# Altium PCB Component Switch.PcbDoc
Units mil, origin at the board's own origin, x right, y up, seen from the top; angles counter-clockwise.
Board outline 5320 x 3965 mil, 2 copper layers (Top Layer, Bottom Layer); 31 components, 41 nets, 188 pads, 24 vias.
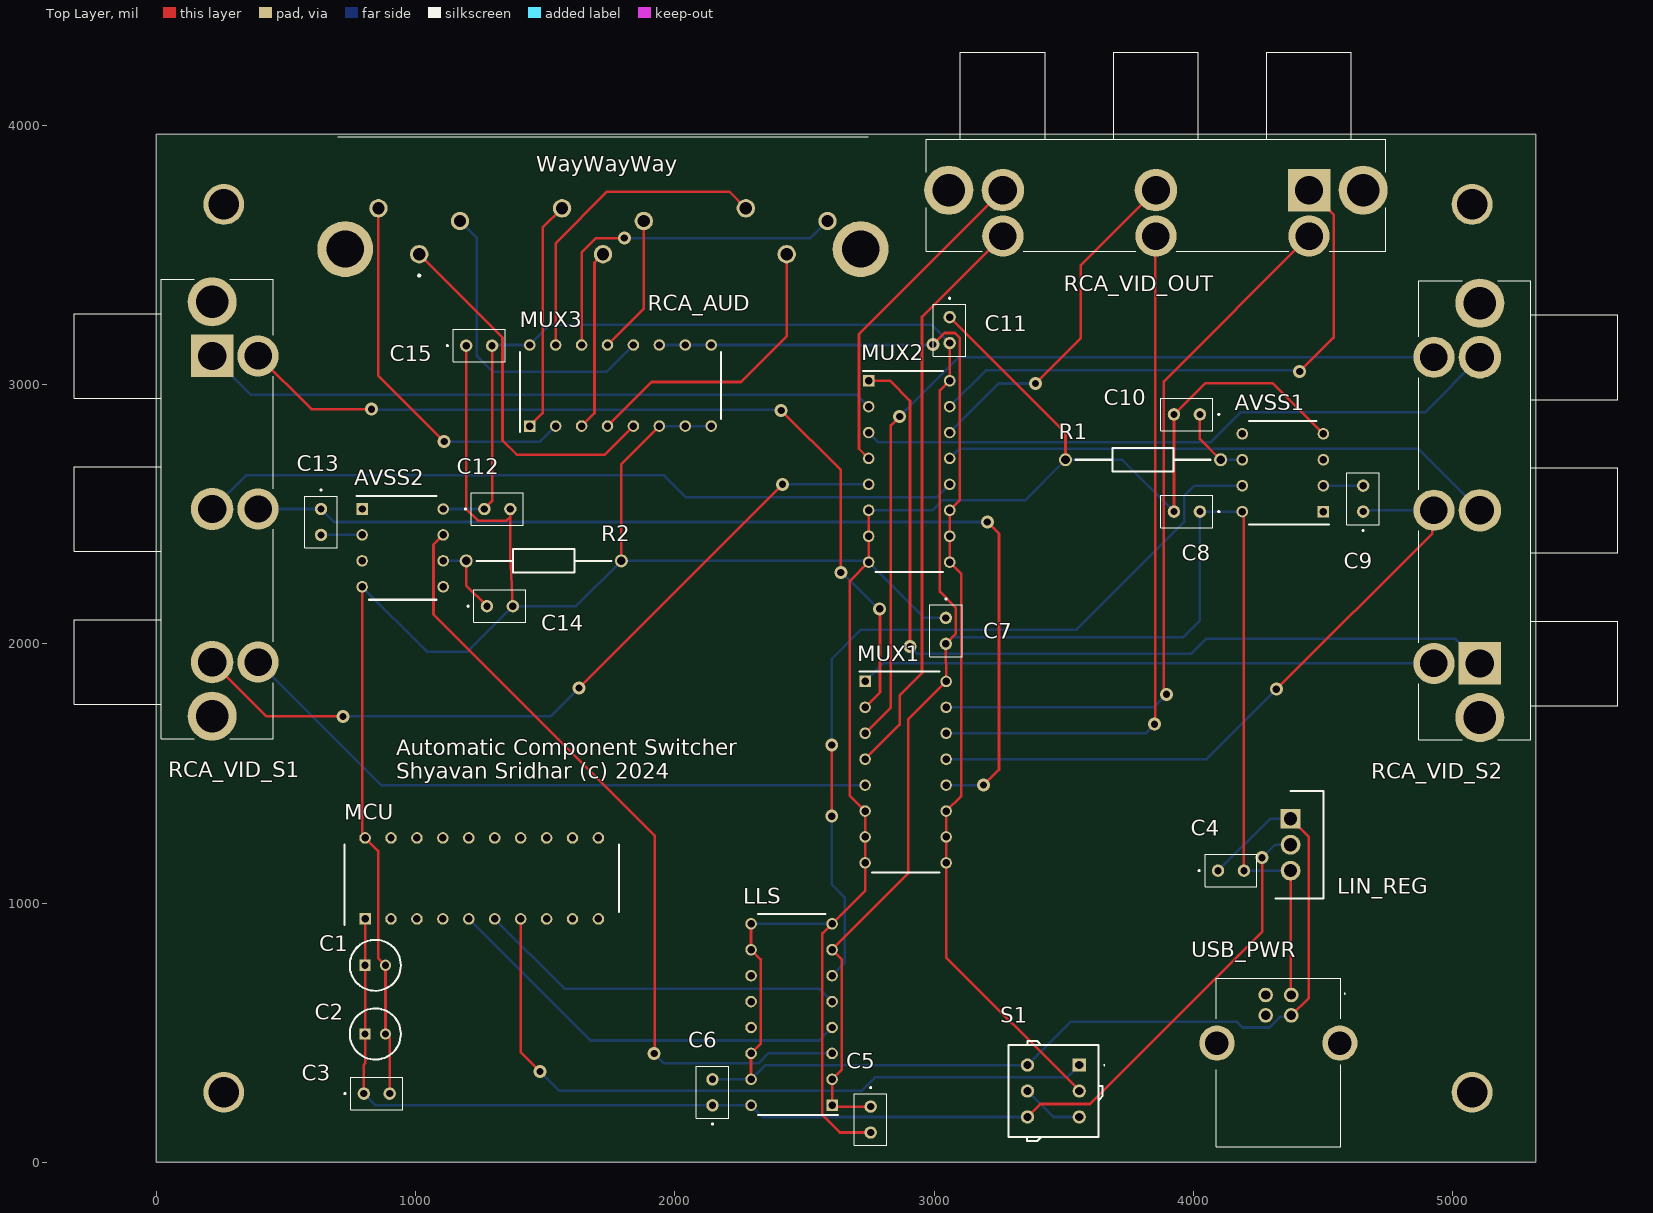
[diagram p0: Top Layer view]
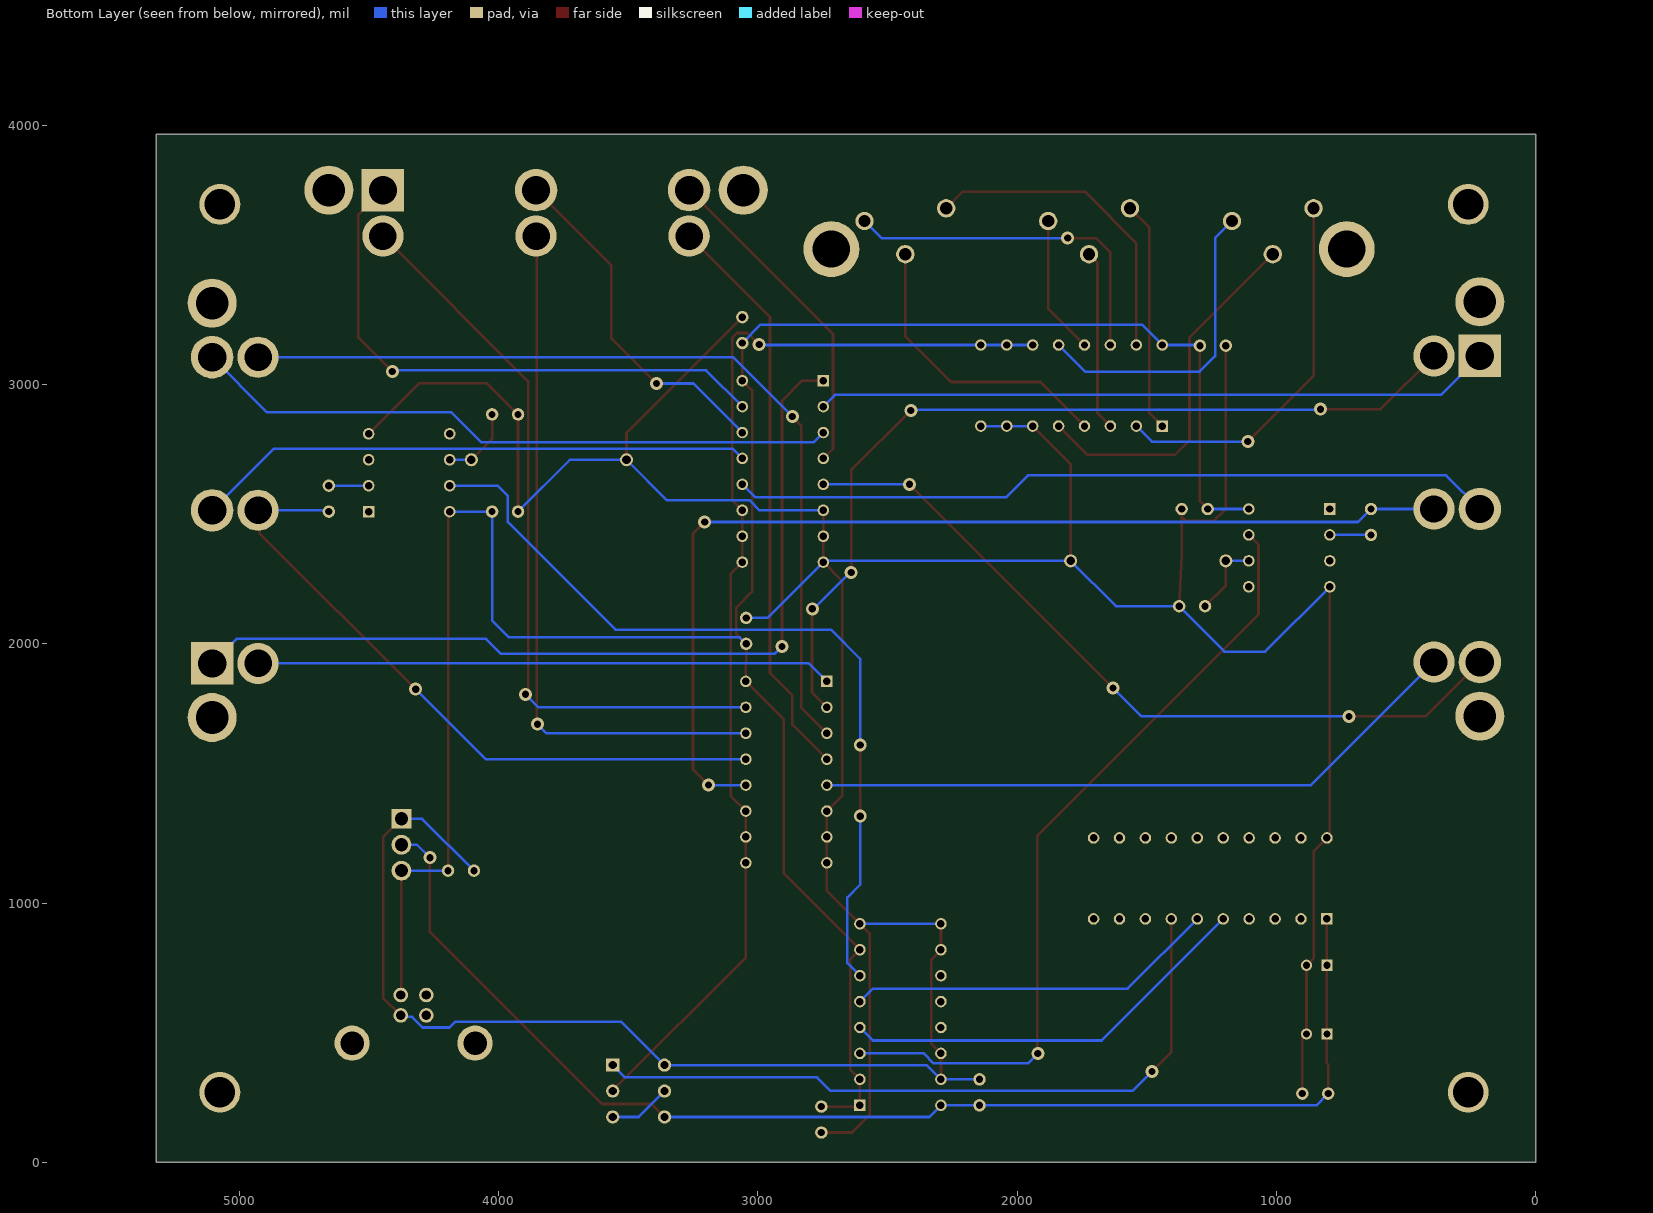
[diagram p1: Bottom Layer view, seen from below]
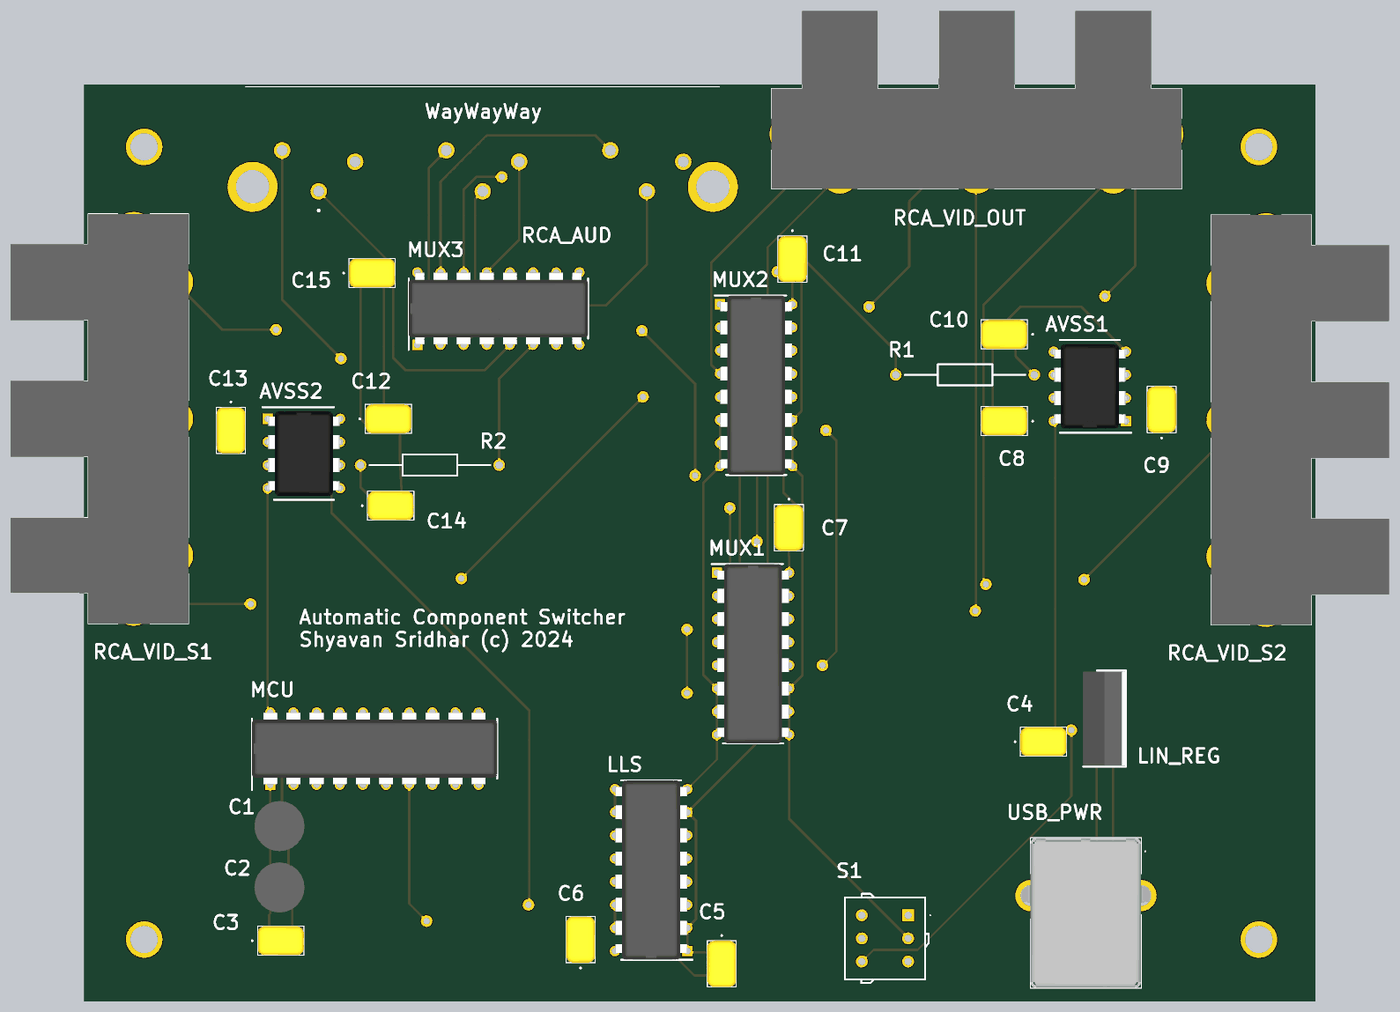
[diagram p2: 3D render of the assembled board from above, using the file's embedded part models]

## Layer stack, top to bottom
Top Solder: solder mask 0.4, Solder Resist, Dk 3.5
Top Layer: signal copper 1.4
Dielectric 1: dielectric 12.6, FR-4, Dk 4.8
Bottom Layer: signal copper 1.4
Bottom Solder: solder mask 0.4, Solder Resist, Dk 3.5

## Board outline
0,0 5320,0 5320,3965 0,3965

## Design rules (kind name [scope] priority, off if disabled: settings)
AssemblyTestpoint [All] p1: testpointundercomponent=TRUE minsize=40 maxsize=100 preferedsize=60 minholesize=0 maxholesize=40 preferedholesize=32 testpointgrid=1 usegrid=TRUE gridoriginx=0 gridoriginy=1295 gridtolerance=0.01 allowsidetop=TRUE allowsidebottom=TRUE
Clearance Clearance_1 [OnMid vs OnMid] p1: gap=10 ignorepadtopadclearanceinfootprint=FALSE sourcerule=37 cellrowname=All cellrowtype=0 cellcolname=All cellcoltype=0 innerlayers=TRUE
Clearance Clearance_2 [(ExistsOnLayer('Top Layer') Or ExistsOnLayer('Bottom Layer')) vs (ExistsOnLayer('Top Layer') Or ExistsOnLayer('Bottom Layer'))] p2: gap=10 ignorepadtopadclearanceinfootprint=FALSE sourcerule=37 cellrowname=All cellrowtype=0 cellcolname=All cellcoltype=0 outerlayers=TRUE
Clearance [All] p3: gap=10 ignorepadtopadclearanceinfootprint=FALSE ismatrix=TRUE
FabricationTestpoint [All] p1: side=3 testpointundercomponent=TRUE minsize=40 maxsize=100 preferedsize=60 minholesize=0 maxholesize=40 preferedholesize=32 testpointgrid=1 allowsidetop=TRUE allowsidebottom=TRUE usegrid=TRUE gridoriginx=0 gridoriginy=1295 gridtolerance=0.01
HoleSize [All] p1: absolutevalues=TRUE maxlimit=200 minlimit=1 maxpercent=80.000 minpercent=20.000
MinimumSolderMaskSliver [All] p1: minsoldermaskwidth=1
PolygonConnect [All] p1: connectstyle=Relief reliefconductorwidth=10 reliefentries=4 polygonreliefangle="90 Angle" airgapwidth=10
RoutingVias [All] p1: holewidth=28 width=50 viastyle="Through Hole" minholewidth=28 minwidth=50 maxholewidth=28 maxwidth=50
SilkToSolderMaskClearance [IsPad] p1: minsilkscreentomaskgap=1 clearancetoexposedcopper=TRUE
SolderMaskExpansion [All] p1: expansion=4 istentingtop=FALSE
SupplyNets "Schematic Supply Nets" [InNet('GND')] p1: voltage=0.000
Width [All] p1: maxlimit=10 minlimit=10 preferedwidth=10
25 further rules are at their usual default settings.

## Components (designator, comment, footprint, x,y, rotation, side; value= is the part's Value field where it differs from the comment)
AVSS1 "LM1881N_NOPB" DIP794W53P254L959H508Q8N 4345,2660 r180 top
AVSS2 "LM1881N_NOPB" DIP794W53P254L959H508Q8N 950,2370 r0 top
C1 "1 μF" CAPPRD200W52D500H1250 805,760 r0 top
C2 "10 μF" CAPPRD200W52D500H1250 805,495 r0 top
C3 "0.1 μF" C320C104K5R5TA 800,265 r0 top
C4 "0.1 μF" C320C104K5R5TA 4095,1125 r0 top
C5 "0.1 μF" C320C104K5R5TA 2755,215 r270 top
C6 "0.1 μF" C320C104K5R5TA 2145,220 r90 top
C7 "0.1 μF" C320C104K5R5TA 3045,2100 r270 top
C8 "0.1 μF" C320C104K5R5TA 4025,2510 r180 top
C9 "0.1 μF" C320C104K5R5TA 4655,2510 r90 top
C10 "0.1 μF" C320C104K5R5TA 4025,2885 r180 top
C11 "0.1 μF" C320C104K5R5TA 3060,3260 r270 top
C12 "0.1 μF" C320C104K5R5TA 1265,2520 r0 top
C13 "0.1 μF" C320C104K5R5TA 635,2520 r270 top
C14 "0.1 μF" C320C104K5R5TA 1275,2145 r0 top
C15 "0.1 μF" C320C104K5R5TA 1195,3150 r0 top
LIN_REG "LM1117T-3.3_NOPB" TO254P470X1028X1955-3P 4375,1325 r270 top
LLS "CD40109BE" DIP794W53P254L1930H508Q16N 2450,570 r180 top
MCU "MSP430G2553IN20" DIP794W53P254L2540H508Q20N 1255,1095 r90 top
MUX1 "CD4053BE" DIP794W53P254L1930H508Q16N 2890,1505 r0 top
MUX2 "CD4053BE" DIP794W53P254L1930H508Q16N 2903.7,2665 r0 top
MUX3 "CD4053BE" DIP794W53P254L1930H508Q16N 1790,2996.3 r90 top
R1 "680 kΩ" RESAD1520W63L600D230 4105,2710 r180 top
R2 "680 kΩ" RESAD1520W63L600D230 1195,2320 r0 top
RCA_AUD "RCJ-61232323" RCJ61232323 1722.48,3502.84 r180 top
RCA_VID_OUT "RCJ-32265" RCJ32265 4446.1,3750 r0 top
RCA_VID_S1 "RCJ-32265" RCJ32265 215,3110.55 r90 top
RCA_VID_S2 "RCJ-32265" RCJ32265 5105,1924.45 r270 top
S1 "A24JP" A24JP 3560,375 r0 top
USB_PWR "UJ2-BH-1-TH" UJ2BH1TH 4377.2,645.43 r0 top

## Footprints (in the part's own frame and the unit in brackets; to place one, negate y for a bottom-side part, rotate by r counter-clockwise, add the part's x,y. Pads: shape width x height; smd on the part's side, far side on the other; paste and mask are expansions set on the pad)
A24JP [mm]
  rect 1.3x1.3 hole 0.8: 1(0,0)
  round 1.3 hole 0.8: 2(0,-2.54) 3(0,-5.08) 4(-5.08,0) 5(-5.08,-2.54) 6(-5.08,-5.08)
  silkscreen extent -6.94,-7.44 2.5,2.36
C320C104K5R5TA [mm]
  round 1.217 hole 0.71: 1(0,0) 2(2.54,0)
  silkscreen extent -1.9,-1.59 3.81,1.59, body extent -1.27,-1.6 3.81,1.59, height 7.36
CAPPRD200W52D500H1250 [mm]
  rect 1.1x1.1 hole 0.7: 1(0,0)
  round 1.1 hole 0.7: 2(2,0)
  silkscreen extent -1.5,-2.5 3.5,2.5, body extent -1.74,-2.75 3.75,2.75, height 12.5
DIP794W53P254L959H508Q8N [mm]
  rect 1.13x1.13 hole 0.73: 1(-3.97,3.81)
  round 1.13 hole 0.73: 2(-3.97,1.27) 3(-3.97,-1.27) 4(-3.97,-3.81) 5(3.97,-3.81) 6(3.97,-1.27) 7(3.97,1.27) 8(3.97,3.81)
  silkscreen extent -4.54,-5.08 3.3,5.08, body extent -4.1,-4.64 4.1,4.64, height 4.21
DIP794W53P254L1930H508Q16N [mm]
  rect 1.13x1.13 hole 0.73: 1(-3.97,8.89)
  round 1.13 hole 0.73: 2(-3.97,6.35) 3(-3.97,3.81) 4(-3.97,1.27) 5(-3.97,-1.27) 6(-3.97,-3.81) 7(-3.97,-6.35) 8(-3.97,-8.89) 9(3.97,-8.89) 10(3.97,-6.35) 11(3.97,-3.81) 12(3.97,-1.27) 13(3.97,1.27) 14(3.97,3.81) 15(3.97,6.35) 16(3.97,8.89)
  silkscreen extent -4.54,-9.84 3.3,9.84, body extent -3.94,-9.84 3.94,9.84, height 5.27
DIP794W53P254L2540H508Q20N [mm]
  rect 1.13x1.13 hole 0.73: 1(-3.97,11.43)
  round 1.13 hole 0.73: 2(-3.97,8.89) 3(-3.97,6.35) 4(-3.97,3.81) 5(-3.97,1.27) 6(-3.97,-1.27) 7(-3.97,-3.81) 8(-3.97,-6.35) 9(-3.97,-8.89) 10(-3.97,-11.43) 11(3.97,-11.43) 12(3.97,-8.89) 13(3.97,-6.35) 14(3.97,-3.81) 15(3.97,-1.27) 16(3.97,1.27) 17(3.97,3.81) 18(3.97,6.35) 19(3.97,8.89) 20(3.97,11.43)
  silkscreen extent -4.54,-13.46 3.3,13.46, body extent -3.94,-13.46 3.94,13.46, height 5.27
RCJ32265 [mm]
  rect 4.16x4.16 hole 2.773: 1(0,0)
  round 4.039 hole 2.693: 2(0,-4.5) 4(-15,-4.5) 6(-30,-4.5)
  round 4.16 hole 2.773: 3(-15,0) 5(-30,0)
  round 4.802 hole 3.202: MH1(5.3,0) MH2(-35.3,0)
  silkscreen extent -37.5,-6 7.5,13.5, body extent -37.5,-6 7.5,13.5, height 19.3
RCJ61232323 [mm]
  round 1.8 hole 1.2: 1(18,0) 2(14,-3.25) 3(22,-4.5) 4(0,0) 5(-4,-3.25) 6(4,-4.5) 7(-18,0) 8(-22,-3.25) 9(-14,-4.5)
  round 5.475 hole 3.65: MH1(-25.25,-0.5) MH2(25.25,-0.5)
  silkscreen extent -26.01,-11.5 26,2.2
RESAD1520W63L600D230 [mm]
  round 1.275 hole 0.85: 1(0,0) 2(15.2,0)
  silkscreen extent 0.99,-1.15 14.21,1.15
TO254P470X1028X1955-3P [mm]
  rect 1.935x1.935 hole 1.29: 1(0,0)
  round 1.935 hole 1.29: 2(2.54,0) 3(5.08,0)
  silkscreen extent -2.73,-1.5 7.81,3.2, body extent -2.6,-1.5 7.68,3.2, height 18.66
UJ2BH1TH [mm]
  round 1.431 hole 0.92: 1(0,0) 2(-2.5,0) 3(-2.5,-2) 4(0,-2)
  round 3.45 hole 2.3: MH1(-7.27,-4.71) MH2(4.77,-4.71)
  silkscreen extent -7.35,-14.87 5.3,1.63, body extent -8.78,-14.83 6.22,1.62, height 11.03

## Part data
AVSS1 AVSS2: "Integrated Circuit", Arrow Part Number=LM1881N/NOPB, Manufacturer_Name="Texas Instruments", Mouser Part Number=926-LM1881N/NOPB, Arrow Price/Stock=https://www.arrow.com/en/products/lm1881nnopb/texas-instruments, Datasheet Link=http://www.ti.com/lit/gpn/lm1881, Height=5.08mm, Manufacturer_Part_Number=LM1881N/NOPB, Mouser Price/Stock=https://www.mouser.co.uk/ProductDetail/Texas-Instruments/LM1881N-NOPB?qs=X1J7HmVL2ZHE9%2FgjmcF9hQ%3D%3D
C1: library part 860020672005, "Capacitor Polarised", Manufacturer_Name="Wurth Elektronik", Mouser Part Number=710-860020672005, Datasheet Link=https://componentsearchengine.com/Datasheets/2/860020672005.pdf, Height=12.5mm, Manufacturer_Part_Number=860020672005, Mouser Price/Stock=https://www.mouser.co.uk/ProductDetail/Wurth-Elektronik/860020672005?qs=0KOYDY2FL29w5cS8aahRvQ%3D%3D
C2: library part 860020472003, "Capacitor Polarised", Manufacturer_Name="Wurth Elektronik", Mouser Part Number=710-860020472003, Datasheet Link=https://katalog.we-online.com/pbs/datasheet/860020472003.pdf, Height=12.5mm, Manufacturer_Part_Number=860020472003, Mouser Price/Stock=https://www.mouser.co.uk/ProductDetail/Wurth-Elektronik/860020472003?qs=0KOYDY2FL2800BT4CoOrXQ%3D%3D
C3 C4 C5 C6 C7 C8 C9 C10 C11 C12 C13 C14 C15: library part C320C104K5R5TA, "Capacitor", Manufacturer_Name=KEMET, Mouser Part Number=80-C320C104K5R, Arrow Part Number=C320C104K5R5TA, Arrow Price/Stock=https://www.arrow.com/en/products/c320c104k5r5ta/kemet-corporation?region=nac, Datasheet Link=https://content.kemet.com/datasheets/KEM_C1050_GOLDMAX_X7R.pdf, Height=5.84mm, Manufacturer_Part_Number=C320C104K5R5TA, Mouser Price/Stock=https://www.mouser.co.uk/ProductDetail/KEMET/C320C104K5R5TA?qs=PmkNt%2FFLxQc4kNUCHU6a6Q%3D%3D
LIN_REG: "Integrated Circuit", Arrow Part Number=LM1117T-3.3/NOPB, Manufacturer_Name="Texas Instruments", Mouser Part Number=926-LM1117T-3.3/NOPB, Arrow Price/Stock=https://www.arrow.com/en/products/lm1117t-3.3nopb/texas-instruments?region=nac, Datasheet Link=http://www.ti.com/lit/ds/symlink/lm1117.pdf, Height=4.7mm, Manufacturer_Part_Number=LM1117T-3.3/NOPB, Mouser Price/Stock=https://www.mouser.co.uk/ProductDetail/Texas-Instruments/LM1117T-3.3-NOPB?qs=X1J7HmVL2ZF7RIQB6O0mNg%3D%3D
LLS: "Integrated Circuit", Manufacturer_Name="Texas Instruments", Mouser Part Number=595-CD40109BE, Arrow Part Number=CD40109BE, Arrow Price/Stock=https://www.arrow.com/en/products/cd40109be/texas-instruments?region=nac, Datasheet Link=http://www.ti.com/lit/ds/symlink/cd40109b.pdf, Height=5.08mm, Manufacturer_Part_Number=CD40109BE, Mouser Price/Stock=https://www.mouser.co.uk/ProductDetail/Texas-Instruments/CD40109BE?qs=gb35HGp1gQIrpwwQZIZgDQ%3D%3D
MCU: "Integrated Circuit", Manufacturer_Name="Texas Instruments", Mouser Part Number=595-MSP430G2553IN20, Arrow Part Number=MSP430G2553IN20, Arrow Price/Stock=https://www.arrow.com/en/products/msp430g2553in20/texas-instruments?region=nac, Datasheet Link=http://www.ti.com/lit/ds/symlink/msp430g2553.pdf, Height=5.08mm, Manufacturer_Part_Number=MSP430G2553IN20, Mouser Price/Stock=https://www.mouser.co.uk/ProductDetail/Texas-Instruments/MSP430G2553IN20?qs=cBe3DO7yhR7KujMhn3Ev6Q%3D%3D
MUX1 MUX2 MUX3: "Integrated Circuit", Manufacturer_Name="Texas Instruments", Mouser Part Number=595-CD4053BE, Arrow Part Number=CD4053BE, Arrow Price/Stock=https://www.arrow.com/en/products/cd4053be/texas-instruments, Datasheet Link=https://www.ti.com/lit/ds/symlink/cd4053b.pdf?ts=1623146784152&ref_url=https%253A%252F%252Fwww.ti.com%252Fstore%252Fti%252Fen%252Fp%252Fproduct%252F%253Fp%253DCD4053BE, Height=5.08mm, Manufacturer_Part_Number=CD4053BE, Mouser Price/Stock=https://www.mouser.co.uk/ProductDetail/Texas-Instruments/CD4053BE?qs=7KMwW2o1%252BmR82X8HX5IMeA%3D%3D
R1 R2: library part CF14JT680K, "Resistor", Manufacturer_Name="Stackpole Electronics", Datasheet Link=https://cs.seielect.com/catalog/SEI-CF_CFM.pdf, Manufacturer_Part_Number=CF14JT680K
RCA_AUD: "Connector", Manufacturer_Name="CUI Devices", Mouser Part Number=490-RCJ-61232323, Arrow Part Number=RCJ-61232323, Arrow Price/Stock=https://www.arrow.com/en/products/rcj-61232323/cui-devices?region=nac, Datasheet Link=https://www.arrow.com/en/products/rcj-61232323/cui-inc, Height=27.5mm, Manufacturer_Part_Number=RCJ-61232323, Mouser Price/Stock=https://www.mouser.co.uk/ProductDetail/CUI-Devices/RCJ-61232323?qs=WyjlAZoYn52CEbg2zDc3Gw%3D%3D
RCA_VID_OUT RCA_VID_S1 RCA_VID_S2: "Connector", Manufacturer_Name="CUI Devices", Mouser Part Number=490-RCJ-32265, Arrow Part Number=RCJ-32265, Arrow Price/Stock=https://www.arrow.com/en/products/rcj-32265/cui-devices?region=nac, Datasheet Link=https://www.mouser.com/datasheet/2/670/rcj-32xxx-1312698.pdf, Height=19.2mm, Manufacturer_Part_Number=RCJ-32265, Mouser Price/Stock=https://www.mouser.co.uk/ProductDetail/CUI-Devices/RCJ-32265?qs=WyjlAZoYn53JfvqllxAfKg%3D%3D
S1: "Switch", Manufacturer_Name="NKK Switches", Mouser Part Number=633-A24JP, Arrow Part Number=A24JP, Arrow Price/Stock=https://www.arrow.com/en/products/a24jp/nkk-switches, Datasheet Link=https://www.nkkswitches.com/pdf/Atoggles.pdf, Height=23.1mm, Manufacturer_Part_Number=A24JP, Mouser Price/Stock=https://www.mouser.co.uk/ProductDetail/NKK-Switches/A24JP?qs=44TLCAUTxJtLIZ6%252BdaihIA%3D%3D
USB_PWR: "Connector", Manufacturer_Name="CUI Devices", Mouser Part Number=490-UJ2-BH-1-TH, Arrow Part Number=UJ2-BH-1-TH, Arrow Price/Stock=https://www.arrow.com/en/products/uj2-bh-1-th/cui-devices?region=nac, Datasheet Link=http://www.cui.com/product/resource/uj2-bh-th.pdf, Height=10mm, Manufacturer_Part_Number=UJ2-BH-1-TH, Mouser Price/Stock=https://www.mouser.co.uk/ProductDetail/CUI-Devices/UJ2-BH-1-TH?qs=5mqXD9RfOg2PqeDe959d6w%3D%3D

## Free pads (board coordinates)
  round 157.48 hole 118.11: 10(260,3695) 11(5075,3695) 12(5075,270) 13(260,270)

## Via types
v1: diameter 50, hole 28, Top Layer to Bottom Layer, 24 vias

## Nets (pads, with @x,y where several pads share a name; then routed paths per layer and width w, separated by ;. In a path a pad name is that pad's centre, name@x,y a point inside that pad or via, vN(x,y) a via of type N, cw(c..) or ccw(c..) an arc to the next point about the centre after c; other vN are vias at no path point)
GND: AVSS1.4 AVSS2.4 C1.2 C2.2 C3.2 C4.1 C5.2 C6.2 C7.1 C8.2 C10.2 C11.1 C12.2 C14.2 C15.1 LIN_REG.1 LLS.8 LLS.9 LLS.10 LLS.14 LLS.15 MCU.20 MUX1.6 MUX1.7 MUX1.8 MUX2.6 MUX2.7 MUX2.8 MUX3.6 MUX3.7 MUX3.8 R1.2 R2.2 S1.4 USB_PWR.4 | length 16873.1
  Top Layer w10: AVSS2.4 793.7,1271.93 805,1260.63 MCU.20 855,1201.3 855,788.74 C1.2 C2.2 900,478.74 C3.2 ; C15.1 1195,2520 1240,2475 1350,2475 1365,2490 ; C12.2 1365,2490 ; C14.2 1365,2343 1365,2490 ; R2.2 1793.43,2693.43 MUX3.6 ; LLS.15 LLS.14 2331,457.3 2331,782.7 LLS.10 LLS.9 ; MUX2.6 MUX2.7 MUX2.8 2675,2242.6 2675,1413.7 MUX1.6 MUX1.7 MUX1.8 2733.7,1047.4 LLS.8 2569,882.7 2569,182 2636,115 C5.2 ; C11.1 3506.57,2813.43 R1.2 ; C8.2 C10.2 4045,3005 4306.3,3005 AVSS1.4 ; LIN_REG.1 4445,1255 4445,634.49 USB_PWR.4
  Bottom Layer w10: AVSS2.4 1043.7,1970 1200,1970 C14.2 1618.43,2145 R2.2 2742.4,2320 2962.4,2100 C7.1 ; MUX3.6 MUX3.7 MUX3.8 ; C6.2 LLS.15 2348.7,375 S1.4 3527.91,542.91 4166.96,542.91 4189.87,520 4293.14,520 4334.03,560.9 4371.41,560.9 USB_PWR.4 ; LLS.9 LLS.8 ; MUX2.6 2993,2515 3031,2553 3349.57,2553 R1.2 3725,2710 C8.2 ; C4.1 4295,1325 LIN_REG.1
NetAVSS1_2: AVSS1.2 C9.2 | length 153.7
  Bottom Layer w10: AVSS1.2 C9.2
NetAVSS1_6: AVSS1.6 C10.1 R1.1 | length 291.8
  Top Layer w10: C10.1 4025,2790 R1.1
  Bottom Layer w10: R1.1 AVSS1.6
NetAVSS1_7: AVSS1.7 LLS.6 | length 3181.9
  Top Layer w10: v1(2605,1335) v1(2605,1610)
  Bottom Layer w10: v1(2605,1335) 2605,1071.44 2655,1021.44 2655,768.7 LLS.6 ; v1(2605,1610) 2605,1942 2718,2055 3549,2055 3964,2470 3964,2570 4004,2610 AVSS1.7
NetAVSS1_8: AVSS1.8 AVSS2.8 C4.2 C5.1 C7.2 C8.1 C11.2 C12.1 C15.2 LIN_REG.3 LLS.1 LLS.2 LLS.7 MUX1.16 MUX2.16 MUX3.16 USB_PWR.1 | length 9640.5
  Top Layer w10: C12.1 1295,2550 C15.2 ; LLS.1 LLS.2 2644,357.7 2644,782.3 LLS.7 2900,1113.7 2900,1708.7 MUX1.16 3046.3,1926 3045,1927.3 C7.2 3083.96,2038.96 3083.96,2139 3022,2200.96 3022,2977 MUX2.16 C11.2 ; LLS.1@2611.3,215 C5.1 ; AVSS1.8 4195,2503.7 C4.2 ; LIN_REG.3 4375,647.64 USB_PWR.1
  Bottom Layer w10: AVSS2.8 C12.1 ; C15.2 1297.6,3152.6 MUX3.16 1518.4,3231 2989,3231 C11.2 ; LLS.1 LLS.1@2611.3,215 ; C7.2 3070,2025 3960,2025 4025,2090 C8.1 AVSS1.8 ; C4.2 LIN_REG.3
NetAVSS2_2: AVSS2.2 C13.2 | length 158.7
  Bottom Layer w10: C13.2 AVSS2.2
NetAVSS2_6: AVSS2.6 C14.1 R2.1 | length 296.8
  Top Layer w10: R2.1 1195,2225 C14.1
  Bottom Layer w10: AVSS2.6 R2.1
NetAVSS2_7: AVSS2.7 LLS.3 | length 3088.2
  Top Layer w10: AVSS2.7 1069,2382.7 1069,2113 1923,1259 1923,423 v1(1920,420)
  Bottom Layer w10: v1(1920,420) 1958,382 2322,382 2360,420 LLS.3
NetC1_1: C1.1 C2.1 C3.1 C6.1 LIN_REG.2 LLS.16 MCU.1 S1.6 | length 4890.5
  Top Layer w10: C3.1 800,377 805,382 C2.1 C1.1 MCU.1 ; S1.6 3410,225 3601,225 4265,889 v1(4265,1175)
  Bottom Layer w10: C3.1 845,220 C6.1 LLS.16 2338.7,175 S1.6 ; v1(4265,1175) 4315,1225 LIN_REG.2
NetC9_1: C9.1 MUX1.13 RCA_VID_S2.4 | length 2602.2
  Top Layer w10: v1(4320,1825) 4921.35,2426.35 4921.35,2508.52 RCA_VID_S2.4
  Bottom Layer w10: MUX1.13 4050,1555 v1(4320,1825) ; C9.1 4660,2515 RCA_VID_S2.4
NetC13_1: C13.1 MUX1.12 RCA_VID_S1.4 | length 4035.7
  Top Layer w10: v1(3190,1455) 3250,1515 3250,2425 v1(3205,2470)
  Bottom Layer w10: RCA_VID_S1.4 C13.1 685,2470 v1(3205,2470) ; MUX1.12 v1(3190,1455)
NetLLS_4: LLS.4 MCU.5 | length 1616.2
  Bottom Layer w10: MCU.5 1673.7,470 2556.3,470 LLS.4
NetLLS_5: LLS.5 MCU.6 | length 1433.3
  Bottom Layer w10: MCU.6 1573.7,670 2556.3,670 LLS.5
NetMCU_7: MCU.7 S1.1 | length 2771.4
  Top Layer w10: MCU.7 1405,425 v1(1480,350)
  Bottom Layer w10: v1(1480,350) 1554,276 2720,276 2772,328 3513,328 S1.1
NetMUX1_1: MUX1.1 RCA_VID_S2.2 | length 2222.9
  Bottom Layer w10: MUX1.1 2803.15,1924.45 RCA_VID_S2.2
NetMUX1_2: MUX1.2 RCA_VID_S1.2 | length 3437.5
  Top Layer w10: RCA_VID_S1.2 597.72,2905 v1(830,2905) ; v1(2410,2900) 2640,2670 v1(2640,2275) ; MUX1.2 2791,1812.3 2791,2134 v1(2790,2135)
  Bottom Layer w10: v1(830,2905) 832.5,2902.5 2407.5,2902.5 v1(2410,2900) ; v1(2640,2275) 2645,2275 2785,2135 v1(2790,2135)
NetMUX1_3: MUX1.3 RCA_VID_S2.6 | length 3432.7
  Top Layer w10: MUX1.3 2833,1754.3 2833,2843 v1(2867,2877)
  Bottom Layer w10: v1(2867,2877) 3095.55,3105.55 RCA_VID_S2.6
NetMUX1_4: MUX1.4 RCA_VID_OUT.6 | length 2237.9
  Top Layer w10: MUX1.4 2867,1688.3 2867,1801 2953,1887 2953,3260.83 RCA_VID_OUT.6
NetMUX1_5: MUX1.5 RCA_VID_S1.6 | length 2538.1
  Bottom Layer w10: RCA_VID_S1.6 866.61,1455 MUX1.5
NetMUX1_9: MUX1.9 MUX1.10 MUX1.11 MUX2.9 MUX2.10 MUX2.11 MUX3.9 MUX3.10 MUX3.11 S1.2 | length 4360.1
  Top Layer w10: v1(2995,3155) 2996,3155 3040,3199 3080,3199 3099,3180 3099,2554 MUX2.11 MUX2.10 MUX2.9 3103.96,2271.04 3103.96,1551.04 ; 3103.25,1411.95 MUX1.11 MUX1.10 MUX1.9 3046.3,790.7 3560,277 S1.2 ; 3103.96,1412.66 3103.96,1550.04
  Bottom Layer w10: MUX3.11 MUX3.10 MUX3.9 2992.6,3152.6 v1(2995,3155)
NetMUX1_14: MUX1.14 RCA_VID_OUT.4 | length 2703.3
  Top Layer w10: v1(3850,1690) 3852.78,1692.78 3852.78,3570.06 RCA_VID_OUT.4
  Bottom Layer w10: MUX1.14 3815,1655 v1(3850,1690)
NetMUX1_15: MUX1.15 RCA_VID_OUT.2 | length 2874.4
  Top Layer w10: v1(3896,1805) 3886,1815 3886,3012.73 RCA_VID_OUT.2
  Bottom Layer w10: MUX1.15 3846,1755 v1(3896,1805)
NetMUX2_1: MUX2.1 RCA_VID_S2.1 | length 3412.1
  Top Layer w10: MUX2.1 2829,3015 2907,2937 v1(2907,1990)
  Bottom Layer w10: v1(2907,1990) 2936,1961 3990,1961 4048,2019 5010.45,2019 RCA_VID_S2.1
NetMUX2_2: MUX2.2 RCA_VID_S1.1 | length 2613.4
  Bottom Layer w10: RCA_VID_S1.1 365.55,2960 2702.4,2960 MUX2.2
NetMUX2_3: MUX2.3 RCA_VID_S2.5 | length 2509.4
  Bottom Layer w10: MUX2.3 2785.4,2777 4066,2777 4182,2893 4892.45,2893 RCA_VID_S2.5
NetMUX2_4: MUX2.4 RCA_VID_OUT.5 | length 1280.4
  Top Layer w10: MUX2.4 2710,2752.4 2710,3195 RCA_VID_OUT.5
NetMUX2_5: MUX2.5 RCA_VID_S1.5 | length 2989.9
  Top Layer w10: RCA_VID_S1.5 424.45,1720 v1(720,1720) ; v1(1630,1830) v1(2415,2615)
  Bottom Layer w10: v1(720,1720) 1520,1720 v1(1630,1830) ; v1(2415,2615) MUX2.5
NetMUX2_12: MUX2.12 RCA_VID_S1.3 | length 2954.8
  Bottom Layer w10: RCA_VID_S1.3 345,2650 1958,2650 2043,2565 3010,2565 MUX2.12
NetMUX2_13: MUX2.13 RCA_VID_S2.3 | length 2159.3
  Bottom Layer w10: MUX2.13 3098,2753 4867,2753 RCA_VID_S2.3
NetMUX2_14: MUX2.14 RCA_VID_OUT.3 | length 1347.7
  Top Layer w10: v1(3391,3004) 3565,3178 3565,3459.45 RCA_VID_OUT.3
  Bottom Layer w10: MUX2.14 3249,3004 v1(3391,3004)
NetMUX2_15: MUX2.15 RCA_VID_OUT.1 | length 2203.6
  Top Layer w10: v1(4410,3050) 4541,3181 4541,3655.1 RCA_VID_OUT.1
  Bottom Layer w10: MUX2.15 3200,3055 4405,3055 v1(4410,3050)
NetMUX3_1: MUX3.1 RCA_AUD.6 | length 891.8
  Top Layer w10: MUX3.1 1490,2890 1490,3605 RCA_AUD.6
NetMUX3_2: MUX3.2 RCA_AUD.3 | length 1459.9
  Top Layer w10: RCA_AUD.3 856.34,3033.66 v1(1110,2780)
  Bottom Layer w10: v1(1110,2780) 1480,2780 MUX3.2
NetMUX3_3: MUX3.3 RCA_AUD.4 | length 697
  Top Layer w10: MUX3.3 1690,2890 1690,3470.36 RCA_AUD.4
NetMUX3_4: MUX3.4 RCA_AUD.7 | length 1151.2
  Top Layer w10: MUX3.4 1909.86,3009.86 2254.86,3009.86 2431.14,3186.14 RCA_AUD.7
NetMUX3_5: MUX3.5 RCA_AUD.1 | length 1424.2
  Top Layer w10: RCA_AUD.1 1335,3181.65 1335,2785 1390,2730 1730,2730 MUX3.5
NetMUX3_12: MUX3.12 RCA_AUD.2 | length 1218.9
  Bottom Layer w10: RCA_AUD.2 1236.04,3566.05 1236.04,3109.96 1296,3050 1737.4,3050 MUX3.12
NetMUX3_13: MUX3.13 RCA_AUD.5 | length 536.2
  Top Layer w10: MUX3.13 1879.96,3292.56 RCA_AUD.5
NetMUX3_14: MUX3.14 RCA_AUD.8 | length 1356.1
  Top Layer w10: MUX3.14 1640,3510 1695,3565 v1(1805,3565)
  Bottom Layer w10: v1(1805,3565) 2522.83,3565 RCA_AUD.8
NetMUX3_15: MUX3.15 RCA_AUD.9 | length 1235
  Top Layer w10: MUX3.15 1540,3545 1739,3744 2209.66,3744 RCA_AUD.9
NetS1_3: S1.3 S1.5 | length 241.4
  Bottom Layer w10: S1.5 3460,175 S1.3
pads on no net: AVSS1.1 AVSS1.3 AVSS1.5 AVSS2.1 AVSS2.3 AVSS2.5 LLS.11 LLS.12 LLS.13 MCU.2 MCU.3 MCU.4 MCU.8 MCU.9 MCU.10 MCU.11 MCU.12 MCU.13 MCU.14 MCU.15 MCU.16 MCU.17 MCU.18 MCU.19 RCA_AUD.MH1 RCA_AUD.MH2 RCA_VID_OUT.MH1 RCA_VID_OUT.MH2 RCA_VID_S1.MH1 RCA_VID_S1.MH2 RCA_VID_S2.MH1 RCA_VID_S2.MH2 USB_PWR.2 USB_PWR.3 USB_PWR.MH1 USB_PWR.MH2

## Silkscreen, mask and mechanical layers (free items; w line width, h text height)
Top Overlay:
  text "WayWayWay" at 1465,3819.99 h60
  text "Automatic Component Switcher / Shyavan Sridhar (c) 2024" at 925,1480 h60
Mechanical 13:
  the board outline again, w10